# EAGLE board FTIR_v0.1_noCC2 (EAGLE 7.1.0)
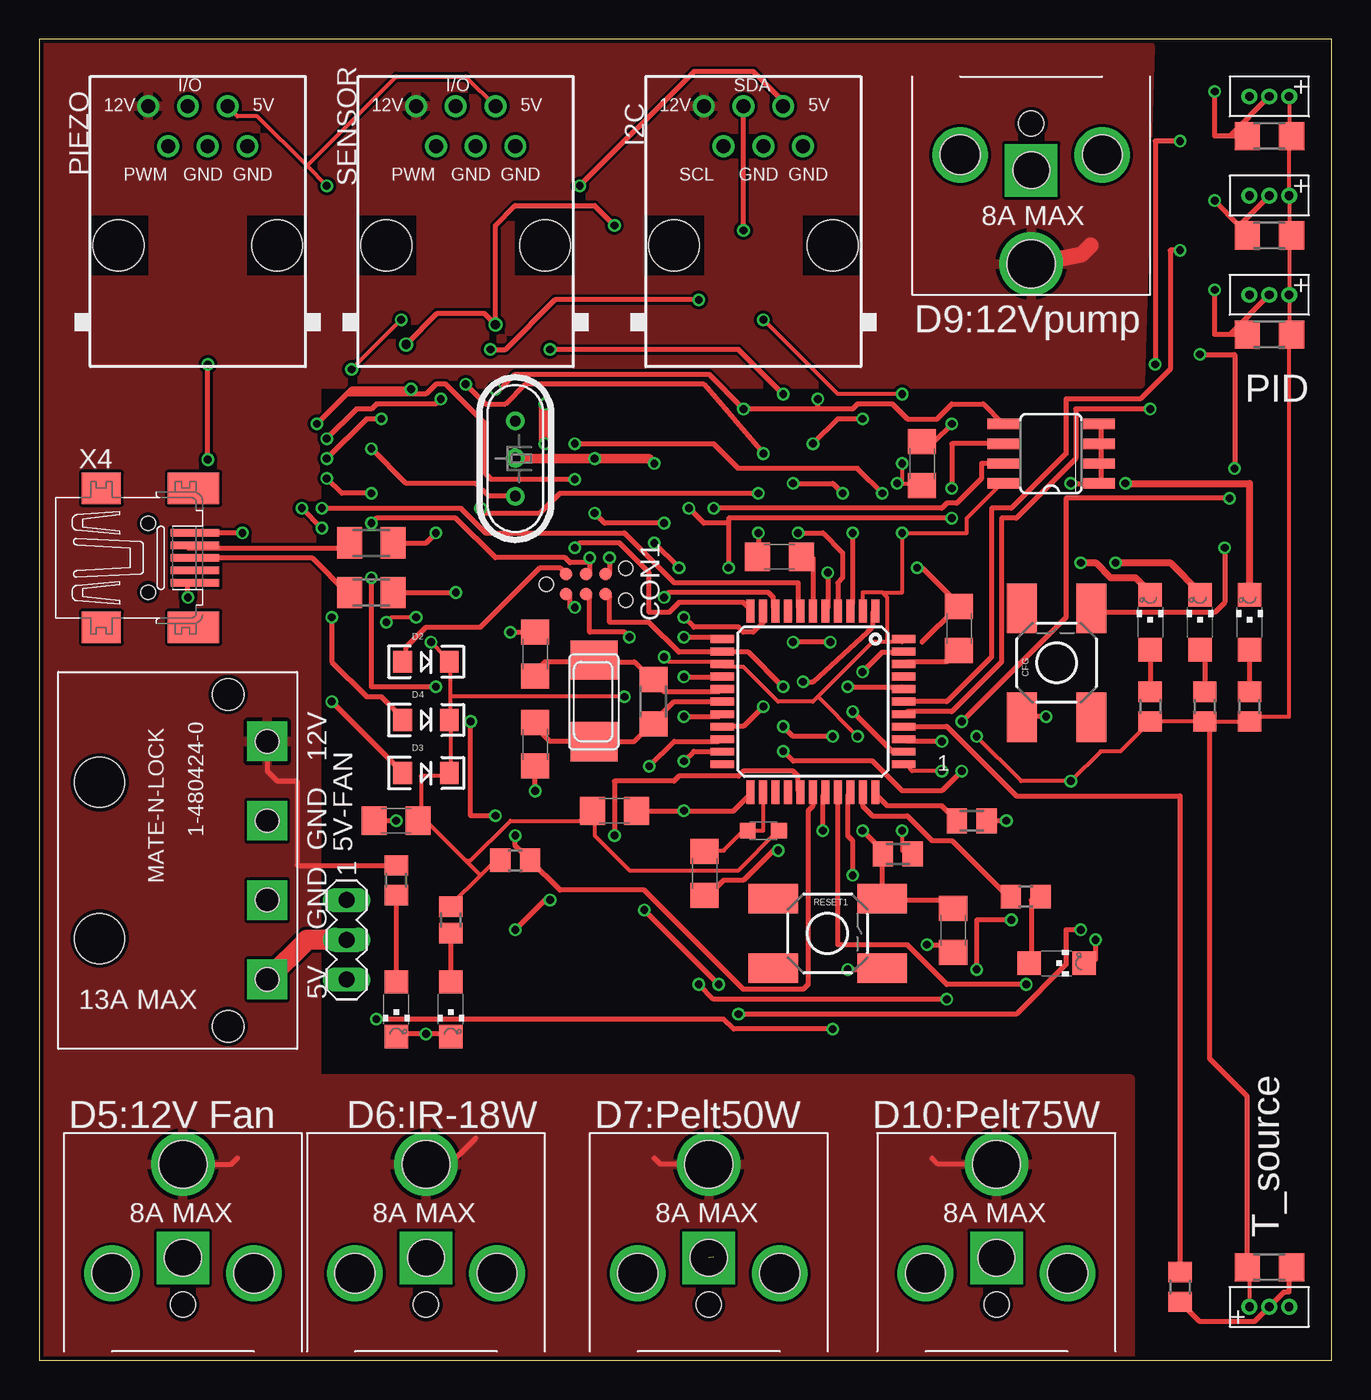
[diagram p0: board, top side]
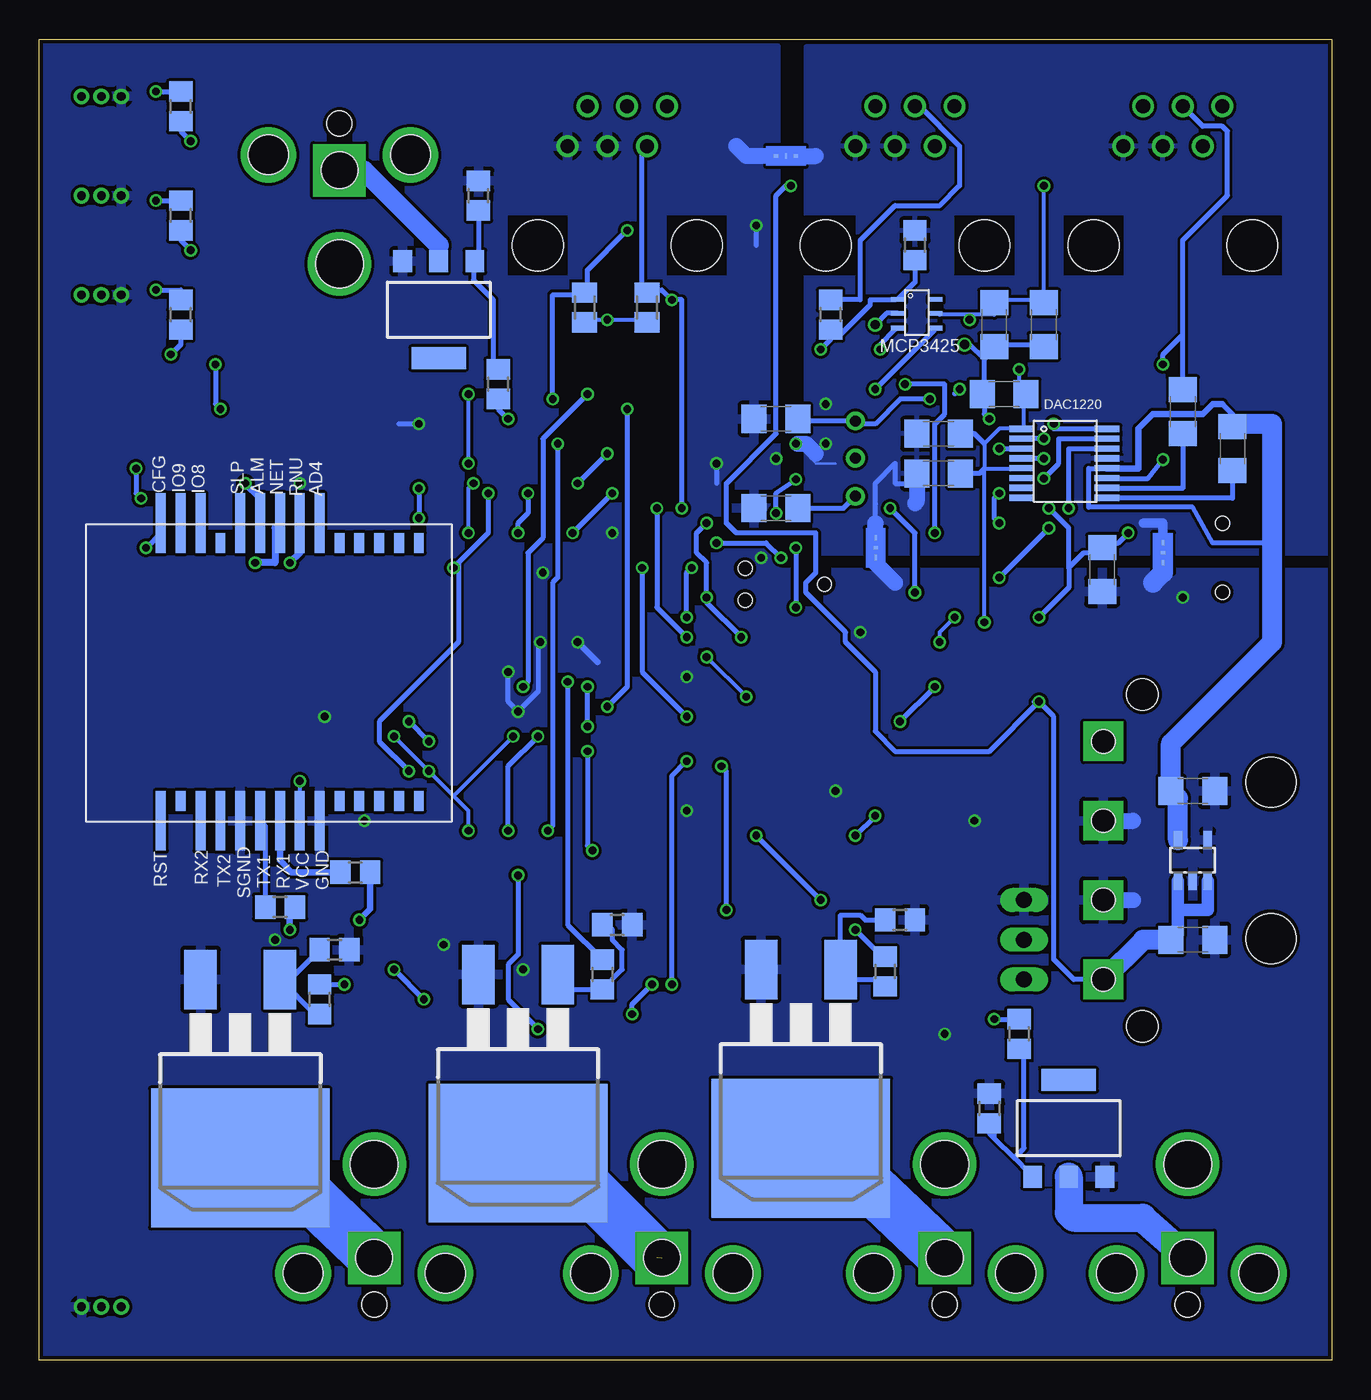
[diagram p1: board, bottom side, seen from below]

Size 82.73 x 84.57 mm. Coordinates in mm from the lower left corner, seen from the top.
Outline: 0,0 82.73,0 82.73,84.57 0,84.57 0,0
Copper layers (1*2*15*16): Top 0.035mm / dielectric 0.2mm / layer 2 0.0175mm / dielectric 1.1mm / layer 15 0.0175mm / dielectric 0.2mm / Bottom 0.035mm
Design rules "SeeedStudio_DRU_no_angle_20130527 *": minimum track width 6mil, minimum drill 0.5mm, track to track 7.5mil, track to pad 7.5mil, pad to pad 7.5mil, via to via 7.5mil, smd to smd 0mil, copper to edge 10mil, drill to drill 10mil, minimum pad ring 6mil, minimum via ring 6mil, stop-mask expansion 2mil, vias tented up to drill 25mil, thermal gap 10mil
Net classes: 0 default: width 0.305 mm, drill 0.254 mm; 1 power: width 0.305 mm, drill 0.254 mm; 2 VIN: width 0.457 mm; 3 fine: width 0.254 mm; 4 aref: width 0.305 mm
vRestrict: area 41.9,34.5 to 57.2,38.4; area 41.9,35.8 to 45.7,49.8; area 53.3,37.1 to 57.2,49.8; area 41.9,46 to 57.2,49.8

## Footprints (pad centres in the part's own frame; a part is rotated, then mirrored left to right if it is on the bottom)
MA03-1 = drill 1.016 long: 1 -2.54,0; 2 0,0; 3 2.54,0
CHIPLED_1206 = smd 1.5 x 1.5: A 0,-1.75; C 0,1.75
C1206 = smd 1.6 x 1.8: 1 -1.4,0; 2 1.4,0
TACTILE_SWITCH_SMD = smd 3.175 x 1.905: 1 -3.493,2.223; 2 3.493,2.223; 3 -3.493,-2.223; 4 3.493,-2.223
TC2030-MCP-NL = smd 0.787 x 0.787: 5V 1.27,0.635; GND 3.81,0.635; MISO 1.27,-0.635; MOSI 2.54,0.635; RESET 3.81,-0.635; SCK 2.54,-0.635 | hole 0.889: 0,0; 5.08,-1.016; 5.08,1.016
LED-1206 = smd 1.2 x 1.4: A -1.5,0; C 1.5,0
RJ12-STRAIGHT-I2C = drill 0.9 pad 1.4: +5V 1.905,8.89; +12V -3.175,8.89; GND1 3.175,6.35; GND2 0.635,6.35; SCL -1.905,6.35; SDA -0.635,8.89 | hole 3.251: -5.08,0; 5.08,0
SOT25 = smd 0.55 x 1.2: 1 -0.95,-1.3; 2 0,-1.3; 3 0.95,-1.3; 4 0.95,1.3; 5 -0.95,1.3
L2012C = smd 1 x 1: 1 -1,0; 2 1,0
RJ12-STRAIGHT = drill 0.9 pad 1.4: +5V 1.905,8.89; +12V -3.175,8.89; GND1 3.175,6.35; GND2 0.635,6.35; I/O -0.635,8.89; PWM -1.905,6.35 | hole 3.251: -5.08,0; 5.08,0
D2PACK = smd 2.083 x 3.81: 1 -2.54,-8.89; 3 2.54,-8.89 | smd 11.43 x 8.89: 2 0,2.54
PG-SOT-223 = smd 1.2 x 1.4: 1 -2.311,-3.099; 2 0,-3.099; 3 2.311,-3.099 | smd 3.5 x 1.4: 4 0,3.099
HC49U = drill 0.7 pad 1.2: 1 -2.413,0; 2 -0.027,0; 3 2.413,0
R0805 = smd 1.3 x 1.5: 1 -0.95,0; 2 0.95,0
R1206 = smd 1.6 x 1.803: 1 -1.422,0; 2 1.422,0
M0805 = smd 1.3 x 1.6: 1 -0.95,0; 2 0.95,0
M1206 = smd 1.6 x 2: 1 -1.4,0; 2 1.4,0
R0805' = smd 1.3 x 1.5: 1 -0.85,0; 2 0.85,0
SO8 = smd 0.66 x 2.032: 1 -3.81,-3.073; 2 -2.54,-3.073; 3 -1.27,-3.073; 4 0,-3.073; 5 0,3.073; 6 -1.27,3.073; 7 -2.54,3.073; 8 -3.81,3.073
STAR = smd 0.152 x 0.305: AGND 0.635,-0.635; DGND 0.635,0.635 | smd 0.305 x 0.152: GND 0.635,0
AMP_MATE_N_LOCK = drill 1.499 pad 2.54 square: 5V 1.905,-7.62; 12V 1.905,7.62; GND1 1.905,2.54; GND2 1.905,-2.54 | hole 1.499: 1.905,-7.62; 1.905,-2.54; 1.905,2.54; 1.905,7.62 | hole 1.999: -0.594,10.617; -0.594,-10.617 | hole 3.2: -8.824,-5; -8.824,5
TQFP44 = smd 1.5 x 0.5: 1 -5.8,4; 2 -5.8,3.2; 3 -5.8,2.4; 4 -5.8,1.6; 5 -5.8,0.8; 6 -5.8,0; 7 -5.8,-0.8; 8 -5.8,-1.6; 9 -5.8,-2.4; 10 -5.8,-3.2; 11 -5.8,-4; 23 5.8,-4; 24 5.8,-3.2; 25 5.8,-2.4; 26 5.8,-1.6; 27 5.8,-0.8; 28 5.8,0; 29 5.8,0.8; 30 5.8,1.6; 31 5.8,2.4; 32 5.8,3.2; 33 5.8,4 | smd 0.5 x 1.5: 12 -4,-5.8; 13 -3.2,-5.8; 14 -2.4,-5.8; 15 -1.6,-5.8; 16 -0.8,-5.8; 17 0,-5.8; 18 0.8,-5.8; 19 1.6,-5.8; 20 2.4,-5.8; 21 3.2,-5.8; 22 4,-5.8; 34 4,5.8; 35 3.2,5.8; 36 2.4,5.8; 37 1.6,5.8; 38 0.8,5.8; 39 0,5.8; 40 -0.8,5.8; 41 -1.6,5.8; 42 -2.4,5.8; 43 -3.2,5.8; 44 -4,5.8
PJ-063BH = drill 2.337 square: GND 0,-5.994 | drill 2.54: SHD1 -4.547,-5.004; SHD2 4.547,-5.004 | drill 3.048: V+ 0,-11.989 | hole 1.6: 0,-2.997 | hole 2.54: -4.547,-5.004; 4.547,-5.004 | hole 3.048: 0,-11.989 | hole 2.337: 0,-5.994
3PINS_SMALL = drill 0.559 pad 1.016: 1 -1.27,0; 2 0,0; 3 1.27,0
SZ05-ZIGBEE3 = smd 1.27 x 0.635: AD1 -7.62,6.35; AD2 -7.62,5.08; AD3 -7.62,3.81; C485 -7.62,-3.81; IO1 -7.62,8.89; IO2 -7.62,7.62; IO3 8.89,8.89; IO4 8.89,7.62; IO5 8.89,6.35; IO6 8.89,5.08; IO7 8.89,3.81; MS 8.89,-6.35 | smd 3.81 x 0.635: AD4 -8.89,2.54; ALM -8.89,-1.27; CFG -8.89,-7.62; GND 10.16,2.54; IO8 -8.89,-5.08; IO9 -8.89,-6.35; NET -8.89,0; RST 10.16,-7.62; RUN -8.89,1.27; RX1 10.16,0; RX2 10.16,-5.08; SLD -8.89,-2.54; SND 10.16,-2.54; TX1 10.16,-1.27; TX2 10.16,-3.81; VCC 10.16,1.27
SSOP-16 = smd 0.4 x 1.6: AGND 1.89,2.134; AVDD 2.52,-3.3; C1 4.409,2.134; C2 3.78,2.134; CS 1.26,2.134; DGND 1.89,-3.3; DNC 3.15,-3.3; DNC1 3.78,-3.3; DNC2 4.409,-3.3; DVDD 0,-3.3; SCLK 0,2.134; SDIO 0.63,2.134; VOUT 3.15,2.134; VREF 2.52,2.134; XIN 1.26,-3.3; XOUT 0.63,-3.3
SOT-23-6 = smd 0.305 x 0.9: SCL 2.45,-0.45; SDA 2.45,1.95; VDD 1.5,1.95; VIN+ 0.6,-0.45; VIN- 0.6,1.95; VSS 1.5,-0.45
NX6035 = smd 2.5 x 3: P$1 2.665,0; P$2 -2.565,0
32005-201 = smd 3.1 x 0.5: 1 3,1.6; 2 3,0.8; 3 3,0; 4 3,-0.8; 5 3,-1.6 | smd 2.5 x 2: M1 -3,-4.45; M2 -3,4.45 | smd 3.3 x 2: M3 2.9,4.45; M4 2.9,-4.45 | hole 0.9: 0,2.2; 0,-2.2

## Placement (x,y rotation side)
5V-FAN  [MA03-1]  19.68,26.92 270 top
5V-OK  RED  [CHIPLED_1206]  26.35,22.48 180 top
12V-OK  RED  [CHIPLED_1206]  22.86,22.48 180 top
BLINK  GREEN  [CHIPLED_1206]  65.13,25.43 270 top
C1  100nF  [C1206]  56.52,57.4 90 top
C2  22pF  [C1206]  31.75,45.21 270 top
C3  100nF  [C1206]  47.38,51.43 0 top
C4  1uF  [C1206]  8.89,26.92 180 bottom
C5  1uF  [C1206]  8.89,36.45 0 bottom
C6  10uF  [C1206]  25.15,59.31 0 bottom
C7  10uF  [C1206]  14.68,50.62 90 bottom
C8  22pF  [C1206]  31.75,39.43 90 top
C9  100nF  [C1206]  58.51,27.52 270 top
C10  10uF  [C1206]  22.86,34.54 180 top
C11  100nF  [C1206]  58.88,46.84 90 top
C12  100nF  [C1206]  36.83,35.18 180 top
C13  100nF  [C1206]  18.41,66.29 90 bottom
C14  10uF  [C1206]  21.59,66.29 90 bottom
C15  2.2nF  [C1206]  9.53,60.73 90 bottom
C16  100nF  [C1206]  42.6,31.17 90 top
C17  0.22nF  [C1206]  6.35,58.36 90 bottom
C18  4.7uF  [C1206]  20.95,61.85 0 bottom
C19  100nF  [C1206]  25.15,56.77 0 bottom
C20  18pF  [C1206]  35.56,60.26 180 bottom
C21  18pF  [C1206]  35.56,54.55 180 bottom
CFG  Configure  [TACTILE_SWITCH_SMD]  65.13,44.65 90 top
CON1  SPI  [TC2030-MCP-NL]  32.46,49.68 0 top
D2  1N581D1206  [LED-1206]  24.77,44.72 0 top
D3  1N581D1206  [LED-1206]  24.77,37.59 0 top
D4  1N581D1206  [LED-1206]  24.77,41 0 top
I2C  RJ12STRAIGHT-I2C  [RJ12-STRAIGHT-I2C]  45.72,71.37 0 top
IC1  LP5907  [SOT25]  8.89,32 0 bottom
L1  10uH  [L2012C]  46.36,33.91 0 top
LED9  RED  [CHIPLED_1206]  71.12,47.24 0 top
LED11  RED  [CHIPLED_1206]  74.3,47.24 0 top
LED12  RED  [CHIPLED_1206]  77.47,47.24 0 top
PIEZO  RJ12  [RJ12-STRAIGHT]  10.16,71.37 0 top
Q1  IRF3704S  [D2PACK]  33.97,16.13 180 bottom
Q3  IRF3704S  [D2PACK]  69.85,15.49 180 bottom
Q4  BSP75  [PG-SOT-223]  57.15,67.25 180 bottom
Q7  IRF3704S  [D2PACK]  52.07,15.81 180 bottom
Q8  BSP75  [PG-SOT-223]  16.83,14.86 0 bottom
QF1  ECS-10.7-7.5A  [HC49U]  30.48,57.72 270 top
R1  10k  [R0805]  26.67,71.37 270 bottom
R2  4.7k  [R1206]  78.74,78.36 180 top
R3  10k  [M0805]  59.69,34.54 180 top
R4  10k  [R0805]  30.48,32 180 top
R8  1K  [R0805]  67.3,29.02 180 bottom
R9  4.7k  [R1206]  78.74,72.01 180 top
R10  4.7k  [R1206]  78.74,65.66 180 top
R11  1K  [R0805]  62.48,31.24 180 bottom
R12  1K  [R0805]  71.12,41.85 270 top
R13  1M  [R1206]  39.32,42.16 270 top
R14  1K  [R0805]  74.61,41.85 270 top
R15  10k  [M0805]  54.97,32.41 0 top
R21  4.7k  [R1206]  78.74,5.97 0 top
R24  22  [M1206]  21.27,49.15 180 top
R28  10K  [M0805]  43.82,67.39 90 bottom
R29  10K  [M0805]  47.8,67.39 90 bottom
R31  22  [M1206]  21.27,52.32 180 top
R32  14.3k  [R0805]  32.07,66.93 90 bottom
R39  1K  [R0805]  77.47,41.85 270 top
RESET1  Reset uC  [TACTILE_SWITCH_SMD]  50.47,27.33 0 top
RL1  1K  [R0805]  64.77,23.11 270 bottom
RL2  1K  [R0805]  46.67,24.7 270 bottom
RL3  1K  [R0805]  22.86,30.73 90 top
RL4  1K  [R0805']  26.35,28.19 270 top
RL5  1K  [R0805]  63.14,29.69 0 top
RL6  1K  [R0805]  73.66,66.93 90 bottom
RL7  1K  [R0805]  73.66,80.26 90 bottom
RL8  1K  [R0805]  73.02,4.7 270 top
RL9  1K  [R0805]  73.66,73.28 90 bottom
RL10  1K  [R0805]  28.57,24.89 270 bottom
RL11  1K  [R0805]  20,20.89 270 bottom
RL12  1K  [R0805]  53.34,62.48 90 bottom
RL13  10K  [R0805]  27.62,28.19 180 bottom
RL14  10K  [R0805]  21.91,16.13 270 bottom
RL15  10K  [R0805]  63.82,26.29 180 bottom
RL16  10K  [R0805]  45.72,27.88 180 bottom
RL17  10K  [R0805]  54.61,74.55 270 bottom
SENSOR  RJ12  [RJ12-STRAIGHT]  27.3,71.37 0 top
U$1  M24512  [SO8]  64.77,59.94 90 top
U$2  STARGND  [STAR]  28.55,52.02 180 bottom
U$3  AMP_MATE_N_LOCK  [AMP_MATE_N_LOCK]  12.7,32 0 top
U$4  ATMEGA32U4  [TQFP44]  49.53,42.16 270 top
U$5  STARGND  [STAR]  34.93,76.45 90 bottom
U$6  JACK_PJ-063BH  [PJ-063BH]  42.86,0.57 180 top
U$9  DS18B20_PINS  [3PINS_SMALL]  78.74,68.2 180 top
U$10  DS18B20_PINS  [3PINS_SMALL]  78.74,3.43 0 top
U$11  DS18B20_PINS  [3PINS_SMALL]  78.74,80.9 180 top
U$12  DS18B20_PINS  [3PINS_SMALL]  78.74,74.55 180 top
U$13  SZ05-ZIGBEESMD  [SZ05-ZIGBEE3]  67.31,44.7 270 bottom
U$14  DAC1220  [SSOP-16]  16.51,59.63 270 bottom
U$15  MCP3425  [SOT-23-6]  27.3,68.52 270 bottom
U$16  JACK_PJ-063BH  [PJ-063BH]  61.28,0.57 180 top
U$17  JACK_PJ-063BH  [PJ-063BH]  24.77,0.57 180 top
U$18  JACK_PJ-063BH  [PJ-063BH]  9.21,0.57 180 top
U$19  JACK_PJ-063BH  [PJ-063BH]  63.5,82.17 0 top
U$20  STARGND  [STAR]  10.16,51.69 180 bottom
X3  16MHz  [NX6035]  35.51,42.16 90 top
X4  MINI-USB  [32005-201]  6.98,51.37 0 top

## Library data of the parts
5V-FAN = con-lstb; OC_FARNELL: unknown; OC_NEWARK: unknown
5V-OK 12V-OK BLINK LED9 LED11 LED12 U$4 = adafruit
C1-C21 L1 R1 R4 R8 R11-R14 R32 R39 RL1-RL3 RL5-RL17 = rcl
CFG CON1 D2-D4 I2C PIEZO RESET1 SENSOR U$1-U$3 U$5 U$6 U$9-U$13 U$16-U$20 X3 = lpatiny
IC1 = v-reg
Q1 Q3 Q7 = transistor-power
Q4 Q8 = infineon; OC_FARNELL: unknown; OC_NEWARK: unknown
QF1 = crystal; OC_FARNELL: unknown; OC_NEWARK: unknown
R2 R3 R9 R10 R15 R21 R24 R28 R29 R31 RL4 = resistor
U$14 = FTIR
U$15 = phMeter
X4 = con-cypressindustries; OC_FARNELL: unknown; OC_NEWARK: unknown

## Nets
2.5V: C5.1 C17.2 IC1.5 U$14.VREF
+5V [power]: 5V-FAN.2 C4.2 D3.A I2C.+5V IC1.1 IC1.3 U$3.5V
+5V/1 [fine]: C1.1 C6.2 C10.1 C12.2 C13.2 C14.2 C18.2 C19.2 D2.C D3.C D4.C L1.2 PIEZO.+5V R2.1 R4.2 R9.1 R10.1 R12.2 R14.2 R15.2 R21.1 R28.1 R29.1 R39.2 RL4.1 SENSOR.+5V U$1.8 U$4.2 U$4.14 U$4.34 U$4.44 U$9.1 U$10.1 U$11.1 U$12.1 U$13.VCC U$14.AVDD U$14.DVDD U$15.VDD
+12V [power]: I2C.+12V PIEZO.+12V RL3.2 SENSOR.+12V U$3.12V U$6.V+ U$16.V+ U$17.V+ U$18.V+ U$19.V+
A0: RL6.1 U$4.36
A1: RL8.1 U$4.37
A2: RL7.1 U$4.38
A3: RL9.1 U$4.39
A4: R1.2 R32.1 U$4.40 U$15.VIN+
A5: U$4.41
AGND: C6.1 C11.2 C16.1 C19.1 PIEZO.GND1 PIEZO.GND2 R1.1 SENSOR.GND1 SENSOR.GND2 U$2.AGND U$5.AGND U$14.AGND U$20.AGND
AREF: C11.1 U$4.42
CS: U$4.25
D5*: RL11.1 U$4.31
D6*: RL10.1 U$4.27
D7*: RL2.1 U$4.1
D8*: R4.1 U$4.28 U$14.CS
D9*: RL12.1 U$4.29
D10*: RL1.1 U$4.30
D11*: U$1.7 U$4.12
D12*: U$4.26
D13*: RL5.1 U$4.32
GND [power]: 5V-FAN.1 5V-OK.C 12V-OK.C BLINK.C C1.2 C2.1 C3.1 C4.1 C5.2 C7.1 C8.1 C9.2 C10.2 C12.1 C13.1 C14.1 C18.1 C20.2 C21.2 CFG.1 CON1.GND I2C.GND1 I2C.GND2 IC1.2 IC1.4 Q1.3 Q3.3 Q4.3 Q7.3 Q8.3 QF1.2 R3.1 RESET1.4 RL13.1 RL14.1 RL15.1 RL16.1 RL17.1 U$1.1 U$1.2 U$1.3 U$1.4 U$2.DGND U$2.GND U$3.GND1 U$3.GND2 U$4.5 U$4.15 U$4.23 U$4.35 U$4.43 U$5.DGND U$5.GND U$9.3 U$10.3 U$11.3 U$12.3 U$13.GND U$13.SND U$14.DGND U$15.VSS U$20.DGND U$20.GND X4.5
GND1 [VIN]: LED9.C U$13.RUN
GND2 [VIN]: LED11.C U$13.NET
GND3 [VIN]: LED12.C U$13.ALM
HWB: R3.2 U$4.33
ISP+5V: CON1.5V D2.A
MISO: CON1.MISO U$4.11
MOSI: CON1.MOSI U$4.10 U$14.SDIO
N$1: Q4.1 RL12.2 RL17.2
N$2: R32.2 SENSOR.I/O
N$3: BLINK.A RL5.2
N$4: Q4.2 U$19.GND
N$6: Q7.1 RL2.2 RL16.2
N$7: Q1.2 U$17.GND
N$9 [power]: R21.2 RL8.2 U$10.2
N$11: R11.2 U$13.RX1
N$12: 5V-OK.A RL4.2
N$13: Q3.1 RL1.2 RL15.2
N$14 [fine]: C16.2 L1.1 U$4.24
N$15: C15.1 U$14.C2
N$16: C3.2 U$4.6
N$17 [power]: R2.2 RL7.2 U$11.2
N$18 [power]: R9.2 RL9.2 U$12.2
N$19: C21.1 QF1.3 U$14.XIN
N$21 [power]: R10.2 RL6.2 U$9.2
N$22: Q8.2 U$18.GND
N$24: R8.2 U$13.TX1
N$25: LED9.A R12.1
N$26: LED11.A R14.1
N$27: LED12.A R39.1
N$28: Q1.1 RL10.2 RL13.2
N$29: C17.1 U$14.C1
N$30: Q7.2 U$6.GND
N$31: C20.1 QF1.1 U$14.XOUT
N$34: Q3.2 U$16.GND
N$35: CFG.4 U$13.CFG
N$37: Q8.1 RL11.2 RL14.2
N$42: C8.2 R13.2 U$4.17 X3.P$2
N$75: 12V-OK.A RL3.1
PIEZO: C15.2 PIEZO.I/O U$14.VOUT
RESET: C9.1 CON1.RESET R15.1 RESET1.2 U$4.13
RX: R8.1 U$4.20
RXLED: U$4.8
SCK: CON1.SCK U$4.9 U$14.SCLK
SCL: I2C.SCL R28.2 U$1.6 U$4.18 U$15.SCL
SDA: I2C.SDA R29.2 U$1.5 U$4.19 U$15.SDA
TX: R11.1 U$4.21
TXLED: U$4.22
USB_N: R31.1 U$4.3
USB_P: R24.1 U$4.4
USBC_N: R31.2 X4.2
USBC_P: R24.2 X4.3
VUSB: C7.2 D4.A U$4.7 X4.1
XTAL1: C2.2 R13.1 U$4.16 X3.P$1

## Tracks (layer width: path | path; a pad name or v marks a point on that pad's centre or on a via)
2.5V
  Bottom 0.305: 6.98,61.21 6.35,60.58 C17.2 | 3.81,52.32 7.62,52.32 8.89,54.61 15.56,54.61 15.56,57.09 14.4,57.09
  Bottom 0.406: 6.98,61.21 7.62,61.21 8.26,60.58 11.43,60.58 12.38,59.63 12.38,57.09 14.4,57.09 U$14.VREF
  Bottom 1.27: IC1.5 9.84,36 C5.1 10.29,39.49 3.81,45.97 3.81,52.32 3.81,59.94 6.16,59.94 C17.2
+5V  (via drill 0.5)
  Top 0.305: v18.73,42.16 23.18,37.72 D3.A | v34.61,75.18 41.91,82.49 45.72,82.49 47.62,80.58 I2C.+5V
  Top 1.27: U$3.5V 17.14,26.92 5V-FAN.2
  Bottom 0.305: 19.05,41.85 v18.73,42.16 | U$3.5V 16.51,24.38 17.78,25.65 17.78,41.21 v18.73,42.16 | v34.61,75.18 34.93,75.18 35.56,74.55 35.56,59.31 38.74,56.13 38.74,53.59 38.1,52.96 33.02,52.96 33.02,50.42 33.66,49.78 33.66,49.15 31.11,46.61 31.11,45.97 29.21,44.07 29.21,40.26 27.94,38.99 21.91,38.99 v18.73,42.16 | 19.05,42.16 v18.73,42.16
  Bottom 0.813: C4.2 arc-90 9.84,27.37 9.84,28.83 | 9.84,28.83 IC1.1 | IC1.3 7.94,28.83 9.84,28.83
  Bottom 1.27: C4.2 12.06,26.92 U$3.5V
+5V/1  (via drill 0.5)
  Top 0.254: U$11.1 80.01,78.36 | 80.01,65.66 U$9.1 80.01,72.01 | 80.01,72.01 U$12.1 80.01,78.36 | 80.01,72.01 R9.1 | 80.01,78.36 R2.1 | v57.79,37.72 55.88,37.72 55.56,38.04 U$4.34 | v55.25,33.91 55.25,32.64 55.88,32.64 R15.2 | R14.2 R12.2 | R14.2 R39.2 77.47,41.21 80.01,41.21 80.01,65.66 | R14.2 | R12.2 69.21,38.99 67.94,38.99 v66.04,37.08 62.87,37.08 v60.01,39.94 | R12.2 | 80.01,65.66 R10.1 | PIEZO.+5V 12.7,79.63 13.97,79.63 17.14,76.45 | v18.41,75.18 17.14,76.45 | SENSOR.+5V 27.3,82.17 22.86,82.17 17.14,76.45 | v23.18,66.61 v20,63.44 | L1.2 47.31,33.91 44.77,31.37 37.78,31.37 35.56,33.59 35.56,35.18 C12.2 35.24,35.18 34.61,34.54 30.16,34.54 27.62,32 27.3,32 | 28.26,31.05 29.21,32 R4.2 | 28.26,31.05 26.35,29.15 RL4.1 | 26.35,42.48 26.35,41.21 D4.C 26.35,40.89 26.35,37.72 D3.C 26.04,37.4 24.45,37.4 24.45,34.54 | 26.35,42.48 26.35,44.7 D2.C 26.04,45.02 v25.08,45.97 | 27.3,32 24.77,34.54 24.45,34.54 | 27.3,32 28.26,31.05 | 24.45,34.54 C10.1 | 49.85,42.48 53.34,45.97 54.29,45.97 | 49.85,42.48 49.53,42.16 47.31,42.16 45.09,44.39 43.82,44.39 U$4.14 43.5,44.7 40.32,44.7 v40.01,45.02 | 54.29,45.97 55.25,45.97 U$4.44 | 53.98,49.15 52.71,49.15 52.71,48.2 U$4.2 | 53.98,49.15 54.29,48.83 54.29,45.97 | 55.25,56.13 56.52,56.13 C1.1 | 53.98,49.15 55.25,49.15 v55.25,52.96 59.37,52.96 59.37,53.91 61.6,56.13 U$1.8 | v46.36,66.61 51.12,61.85 v55.25,61.85 | 55.25,56.13 v55.25,57.4 | 55.25,56.13 v54.93,56.13 | v37.47,42.48 26.35,42.48 | v22.22,47.24 22.54,47.56 v24.13,47.56 | 49.85,42.48 v52.39,39.94 | U$10.1 77.47,5.97 R21.1
  Top 0.305: R21.1 77.32,16.92 74.93,19.3 74.93,40.58 R14.2
  Bottom 0.254: 56.2,36.13 55.25,35.18 v55.25,33.91 | 56.2,36.13 v57.79,37.72 v60.01,39.94 | v66.04,37.08 U$13.VCC | 22.22,57.09 20,57.09 U$14.AVDD | 22.22,57.09 22.22,58.67 21.27,59.63 U$14.DVDD 19.68,59.63 19.68,61.85 | 23.18,66.93 21.59,66.93 C14.2 21.59,67.88 18.41,67.88 | 23.18,66.93 25.08,66.93 U$15.VDD | 18.41,67.88 v18.41,75.18 | 18.41,67.88 C13.2 | 19.68,61.85 20,62.17 v20,63.44 | 23.18,66.93 v23.18,66.61 | 19.68,61.85 C18.2 | R28.1 43.82,66.61 v46.36,66.61 47.62,66.61 R29.1 | v54.93,56.13 55.25,55.82 v55.25,52.96 | v55.25,57.4 v55.25,61.85 | v40.01,45.02 v37.47,42.48 | v22.22,47.24 22.22,57.09 | v24.13,47.56 25.08,46.61 v25.08,45.97 | v52.39,39.94 56.2,36.13
  Bottom 0.305: 22.22,58.67 22.86,59.31 C6.2 | 22.22,57.09 22.54,56.77 C19.2
+12V
  Top 0.305: U$17.V+ 26.28,12.56 27.94,14.22 | U$6.V+ 39.76,12.56 39.37,12.95 | U$16.V+ 57.54,12.56 57.15,12.95 | U$18.V+ 12.31,12.56 12.7,12.95 | RL3.2 16.51,31.69 16.51,37.08 15.24,37.08 14.61,37.72 U$3.12V
  Top 1.016: U$19.V+ 66.75,70.81 67.31,71.37
  pour Top: 0,0.25 69.85,0.25 69.85,18.03 17.78,18.03 17.78,62.48 70.48,62.48 71.12,84.07 0,84.07
A0  (via drill 0.5)
  Top 0.305: v57.79,39.62 55.56,39.62 U$4.36 | v59.05,40.89 65.72,47.56 65.72,55.18 v76.2,55.18 | v76.52,57.09 76.52,64.39 v74.3,64.39
  Bottom 0.305: v59.05,40.89 v57.79,39.62 | v76.2,55.18 76.52,55.5 v76.52,57.09 | v74.3,64.39 73.66,65.02 RL6.1
A1
  Top 0.305: RL8.1 73.02,36.13 62.55,36.13 58.1,40.58 55.56,40.58 U$4.37
A2  (via drill 0.5)
  Top 0.305: v71.12,60.9 66.36,60.9 66.36,57.72 62.55,53.91 61.6,53.91 61.6,44.7 58.42,41.53 55.56,41.53 U$4.38 | v71.44,63.75 71.44,78.04 v73.02,78.04
  Bottom 0.305: v71.12,60.9 71.44,61.21 v71.44,63.75 | v73.02,78.04 73.66,78.68 RL7.1
A3  (via drill 0.5)
  Top 0.305: U$4.39 58.1,42.16 60.96,45.02 60.96,54.55 62.23,54.55 65.72,58.04 65.72,61.53 70.48,61.53 72.39,63.44 72.39,71.06 v73.02,71.06
  Bottom 0.305: v73.02,71.06 73.66,71.69 RL9.1
A4  (via drill 0.5)
  Top 0.305: v51.75,43.12 55.25,43.12 U$4.40 | 33.02,64.71 v32.7,64.71 44.77,64.71 v47.62,61.85
  Bottom 0.305: 32.07,65.66 31.43,65.66 29.53,67.56 29.53,67.88 27.94,67.88 U$15.VIN+ 26.67,69 R1.2 | 32.07,65.66 R32.1 | v51.75,43.12 51.44,43.43 51.44,51.69 50.48,52.64 50.48,58.99 v47.62,61.85 | v32.7,64.71 32.07,65.34 32.07,65.66
AGND  (via drill 0.5)
  Top 0.305: v47.31,32.64 46.99,32.64 45.09,30.73 43.82,30.73 42.86,29.78 C16.1 | 56.52,45.97 58.74,48.2 C11.2 58.74,48.51 56.52,50.74 v56.2,50.74 | v53.98,55.5 52.39,57.09 44.77,57.09 43.18,58.67 v34.29,58.67 | v47.62,38.99 48.26,38.35 53.34,38.35 55.25,36.45 57.79,36.45 v59.05,37.72
  Top 0.813: v32.38,58.67 v32.38,61.21
  Bottom 0.152: 31.75,57.4 33.02,57.4 v34.29,58.67
  Bottom 0.305: v47.31,32.64 47.62,32.96 v47.62,38.99 | 55.88,51.05 53.98,52.96 v53.98,55.5 | 55.88,51.05 v56.2,50.74 | v34.29,58.67 34.16,58.67 | 29.18,53.57 29.18,54.84 29.21,54.86 29.21,56.13 27.94,57.4 27.94,56.13 26.55,56.13 | 55.88,51.05 55.88,45.97 60.96,40.89 60.96,39.62 v59.05,37.72
  Bottom 0.61: U$20.AGND 10.79,53.59 12.06,53.59
  Bottom 1.016: 34.16,58.67 33.65,58.67 33.02,58.04 | U$5.AGND 33.02,77.09 | U$2.AGND 29.18,53.57 29.21,53.59 | C19.1 26.55,56.13 26.55,54.99 26.67,54.86
  pour Bottom: 0,84.07 33.66,84.07 33.66,51.69 0,51.69
AREF
  Top 0.305: U$4.42 55.56,44.7 58.1,44.7 58.74,45.34 C11.1
D5*  (via drill 0.5)
  Top 0.305: v21.59,21.84 43.82,21.84 44.45,21.21 v50.8,21.21 | v52.07,31.05 52.07,33.27 51.75,33.59 51.75,36.13 U$4.31
  Bottom 0.305: v21.59,21.84 RL11.1 | v50.8,21.21 52.71,23.11 52.71,25.34 52.07,25.97 v52.07,31.05
D6*  (via drill 0.5)
  Top 0.305: v30.48,27.56 32.38,29.46 v32.7,29.46 | v36.83,33.59 36.83,37.08 40.64,37.08 40.96,37.4 44.77,37.4 45.09,37.72 48.26,37.72 48.58,37.4 48.58,36.45 U$4.27
  Bottom 0.305: 30.16,27.24 v30.48,27.56 29.21,26.29 28.57,26.29 RL10.1 | v36.83,33.59 v32.7,29.46
D7*  (via drill 0.5)
  Top 0.305: U$4.1 53.34,47.88 53.34,46.93 53.02,46.61 49.53,43.43 v48.9,43.43
  Bottom 0.305: v48.9,43.43 48.9,27.88 RL2.1
D8*  (via drill 0.5)
  Top 0.305: R4.1 33.34,30.1 38.74,30.1 45.09,23.75 48.9,23.75 49.21,24.07 49.21,35.18 49.53,35.5 U$4.28 | v18.1,53.28 v16.83,54.55 | v21.27,50.1 21.27,43.12 v25.4,43.12 | v27.62,40.89 27.62,34.86 v29.21,34.86 | v30.48,33.59 30.48,32.96 R4.1 | R4.1
  Bottom 0.305: v16.83,54.55 16.83,58.36 14.61,58.36 U$14.CS | v21.27,50.1 v18.1,53.28 | v27.62,40.89 v25.4,43.12 | v30.48,33.59 v29.21,34.86
D9*  (via drill 0.5)
  Top 0.305: v50.17,33.91 50.17,36.13 U$4.29 | v49.53,58.67 51.12,60.26 v52.71,60.26
  Bottom 0.305: v50.17,33.91 49.85,34.23 49.85,49.78 49.53,50.1 v49.53,58.67 | v52.71,60.26 53.34,60.9 RL12.1
D10*  (via drill 0.5)
  Top 0.305: v63.18,24.07 58.1,24.07 55.56,26.61 51.12,26.61 51.12,36.13 U$4.30
  Bottom 0.305: v63.18,24.07 RL1.1
D11*  (via drill 0.5)
  Top 0.305: v41.28,46.29 43.5,46.29 U$4.12 | v43.18,54.55 57.79,54.55 58.1,54.86 58.74,54.86 60.33,56.45 60.33,57.4 U$1.7
  Bottom 0.305: v41.28,46.29 43.18,48.2 v43.18,54.55
D13*
  Top 0.305: RL5.1 61.91,29.78 58.42,33.27 57.15,33.27 55.56,34.86 53.34,34.86 52.71,35.5 52.71,36.13 U$4.32
GND  (via drill 0.5, 0.6)
  Top 0.305: v18.41,57.72 20.95,60.26 v21.91,60.26 | C12.1 v41.28,35.18 44.45,35.18 45.4,36.13 U$4.23 | 67.94,57.4 67.94,56.13 U$1.1 v66.04,56.13 | 67.94,58.67 67.94,59.94 U$1.4 | 67.94,58.67 67.94,57.4 | 67.94,57.4 U$1.2 | 67.94,58.67 U$1.3 | 12V-OK.C 22.86,20.89 v24.77,20.89 26.35,20.89 5V-OK.C | v36.51,51.37 36.51,50.42 CON1.GND | v67.63,26.92 67.63,25.65 66.99,25.65 BLINK.C | v41.28,43.75 43.5,43.75 U$4.15 | v50.48,50.42 50.48,48.2 U$4.5 | v61.91,34.54 R3.1 | v56.83,26.61 58.1,26.61 58.42,26.29 C9.2 | v22.86,34.54 C10.2 | v31.75,36.45 C8.1 | v30.16,46.61 C2.1 | v46.04,52.96 46.04,51.69 C3.1 | v9.53,48.83 9.53,49.78 X4.5 | v51.75,25.02 53.66,25.02 RESET1.4 | v64.45,41.21 63.18,41.21 CFG.1 | C1.2 57.28,58.8 v58.42,59.94 | v36.83,72.64 35.56,73.91 30.48,73.91 29.21,72.64 v29.21,66.29 28.49,67.02 25.49,67.02 v23.5,65.02 | v50.65,45.97 v48.26,45.97 | v52.07,41.53 54.61,38.99 55.25,38.99 U$4.35 | v52.71,44.07 53.98,45.34 55.25,45.34 U$4.43
  Top 0.61: QF1.2 30.51,57.72 v35.56,57.72 39.05,57.72 v39.37,57.4
  Bottom 0.152: U$5.GND U$5.DGND
  Bottom 0.305: C13.1 18.41,65.02 21.59,65.02 C14.1 21.59,64.71 22.22,64.07 | v18.41,57.72 19.68,57.72 U$14.DGND | v21.91,60.26 22.22,60.58 22.22,61.85 | 22.22,61.85 22.22,64.07 | 22.22,61.85 C18.1 | U$20.DGND U$20.GND | U$2.DGND U$2.GND | v58.42,59.94 59.69,59.94 | U$15.VSS 28.49,67.02 v29.21,66.29 | v36.83,72.64 36.83,71.37 | 22.22,64.07 23.18,65.02 v23.5,65.02 | v39.37,57.4 39.37,56.13 | v50.65,45.97 50.8,45.97 50.8,42.8 v52.07,41.53 52.71,42.16 v52.71,44.07
  Bottom 0.406: v48.26,45.97 46.99,44.7
  Bottom 1.016: U$2.DGND 29.18,51.03 27.94,49.78 | U$5.DGND 37.47,77.09 38.1,77.72 | U$3.GND1 12.7,34.54 | U$3.GND2 12.7,29.46
  Bottom 1.27: U$20.DGND 10.79,50.42 11.43,49.78
  pour Bottom: 35.56,84.07 82.55,84.07 82.55,0.25 0,0.25 0,50.42 35.56,50.42
GND1  (via drill 0.5)
  Top 0.457: v66.67,51.05 67.63,51.05 68.58,50.1 70.17,50.1 71.12,49.15 LED9.C
  Bottom 0.457: v66.67,51.05 66.04,51.69 U$13.RUN
GND2  (via drill 0.5)
  Top 0.457: v68.9,51.05 72.39,51.05 74.3,49.15 LED11.C
  Bottom 0.457: v68.9,51.05 67.63,51.05 67.63,53.28 U$13.NET
GND3  (via drill 0.5)
  Top 0.457: LED12.C 77.47,56.13 v69.53,56.13
  Bottom 0.457: v69.53,56.13 68.58,55.18 U$13.ALM
HWB
  Top 0.305: U$4.33 53.66,36.13 54.29,35.5 57.79,35.5 R3.2
ISP+5V
  Top 0.305: CON1.5V 33.66,50.42 33.34,50.74 32.07,50.74 28.26,46.93 24.77,46.93 23.5,45.66 23.5,45.02 D2.A
MISO  (via drill 0.5)
  Top 0.305: v34.29,48.2 33.97,48.2 33.97,48.83 CON1.MISO | v34.29,52.01 34.61,52.32 37.15,52.32 39.05,50.42 39.05,47.88 40.32,47.88 40.96,48.51 45.09,48.51 45.4,48.2 U$4.11
  Bottom 0.305: v34.29,52.01 v34.29,48.2
MOSI  (via drill 0.5)
  Top 0.305: 35.24,51.05 35.24,50.42 CON1.MOSI | v40.96,50.74 v39.37,52.32 | v41.28,47.56 41.91,46.93 44.77,46.93 45.09,46.61 45.72,46.61 46.36,47.24 46.36,47.88 U$4.10 | v18.41,56.45 19.37,55.5 v21.27,55.5 | v21.27,53.59 21.59,53.91 26.67,53.91 29.21,51.37 33.66,51.37 33.97,51.05 35.24,51.05 | 35.24,51.05 v35.24,51.37
  Bottom 0.305: v35.24,51.37 36.2,52.32 v39.37,52.32 | v40.96,50.74 41.28,50.42 v41.28,47.56 | v18.41,56.45 17.46,57.4 17.46,58.99 14.61,58.99 U$14.SDIO | v21.27,55.5 21.59,55.18 21.59,53.91 v21.27,53.59
N$1
  Bottom 0.305: RL17.2 54.61,70.42 Q4.1 54.93,70.1 54.93,69.15 53.66,67.88 53.66,63.75 RL12.2
N$2
  Bottom 0.305: SENSOR.I/O 26.35,80.26 23.81,77.72 23.81,75.18 25.08,73.91 27.94,73.91 30.16,71.69 30.16,67.88 R32.2
N$3
  Top 0.305: BLINK.A 63.5,25.65 63.5,29.46 63.82,29.46 RL5.2
N$4
  Bottom 1.016: 57.15,71.37 Q4.2
  Bottom 1.27: 57.15,71.37 61.95,76.17 U$19.GND
N$6
  Bottom 0.305: RL2.2 49.53,23.75 Q7.1 | RL2.2 45.4,25.02 45.4,26.29 46.04,26.92 46.04,27.56 46.36,27.88 RL16.2 | RL2.2
N$7
  Bottom 1.676: Q1.2 32.11,13.59
  Bottom 3.302: 32.11,13.59 U$17.GND
N$9
  Top 0.305: RL8.2 74.3,2.48 77.79,2.48 U$10.2 79.69,4.38 80.01,4.38 80.01,5.97 R21.2
N$11
  Bottom 0.406: R11.2 66.55,31.24 67.31,32 U$13.RX1
N$12
  Top 0.305: RL4.2 5V-OK.A
N$13
  Bottom 0.305: 66.99,24.07 65.41,22.48 64.77,22.48 RL1.2 | 66.99,24.07 RL15.2 | 66.99,24.07 Q3.1
N$14
  Top 0.254: C16.2 42.86,32.64 43.82,32.64 45.09,33.91 L1.1 46.36,33.91 46.36,36.13 U$4.24
N$15
  Bottom 0.305: C15.1 9.53,55.82 14.29,55.82 U$14.C2
N$16
  Top 0.305: U$4.6 49.53,51.37 48.9,51.37 C3.2
N$17  (via drill 0.5)
  Top 0.305: v75.25,81.22 75.25,78.36 76.2,78.36 | R2.2 76.2,78.36 | 76.2,78.36 U$11.2
  Bottom 0.305: v75.25,81.22 RL7.2
N$18  (via drill 0.5)
  Top 0.305: 76.83,72.64 77.47,72.01 R9.2 76.83,72.64 | 76.83,72.64 v75.25,74.23 | 76.83,72.64 U$12.2
  Bottom 0.305: v75.25,74.23 RL9.2
N$19  (via drill 0.5)
  Top 0.305: QF1.3 28.77,55.31 27.94,56.13 23.5,56.13 v21.27,58.36
  Bottom 0.305: v21.27,58.36 20,58.36 U$14.XIN | C21.1 31.24,54.55 QF1.3
N$21  (via drill 0.5)
  Top 0.305: v75.25,68.52 75.25,65.66 76.2,65.66 | R10.2 76.2,65.66 | 76.2,65.66 U$9.2
  Bottom 0.305: v75.25,68.52 73.66,68.52 RL6.2
N$22
  Bottom 1.778: Q8.2 16.83,9.46 16.51,9.14 12.1,9.14 U$18.GND
N$24
  Bottom 0.305: U$13.TX1 68.26,34.23 68.26,29.46 68.58,29.15 R8.2
N$25
  Top 0.305: LED9.A R12.1
N$26
  Top 0.305: R14.1 74.61,45.34 74.3,45.34 LED11.A
N$27
  Top 0.305: LED12.A R39.1
N$28
  Bottom 0.305: RL10.2 28.57,24.38 31.43,24.38 Q1.1 31.43,28.51 30.16,28.51 29.84,28.19 RL13.2
N$29
  Bottom 0.305: C17.1 6.35,55.18 14.29,55.18 U$14.C1
N$30  (1 unrouted)
  Bottom 1.676: Q7.2 49.89,13.27
  Bottom 3.048: 49.89,13.27 49.85,13.27
  Bottom 3.302: 49.85,13.27 43.18,6.6
N$31  (via drill 0.5)
  Top 0.305: v18.41,58.99 20.32,60.9 21.27,60.9 21.59,61.21 25.4,61.21 v25.72,61.53
  Bottom 0.305: v18.41,58.99 19.68,58.99 U$14.XOUT | v25.72,61.53 27.62,61.53 29.21,59.94 30.29,59.94 QF1.1 34.03,60.13 C20.1
N$34
  Bottom 3.048: Q3.2 67.98,12.95
  Bottom 3.302: 67.98,12.95 U$16.GND
N$35  (via drill 0.5)
  Top 0.305: v75.88,52.01 75.88,48.51 75.25,47.88 67.63,47.88 CFG.4
  Bottom 0.305: v75.88,52.01 74.93,52.96 U$13.CFG
N$37
  Bottom 0.305: 21.59,14.22 21.91,14.54 RL14.2 | 21.59,14.22 20.32,12.95 | 20.32,12.95 19.37,12 Q8.1 | 21.59,14.22 21.59,14.54 | 20.32,12.95 19.68,13.59 19.68,19.62 RL11.2
N$42
  Top 0.305: U$4.17 40.64,42.16 39.37,40.89 R13.2 39.05,40.58 38.1,39.62 35.56,39.62 X3.P$2 35.24,39.62 32.7,39.62 31.75,40.58 C8.2
N$75
  Top 0.305: RL3.1 12V-OK.A
PIEZO  (via drill 0.5)
  Top 0.305: v10.79,57.66 v10.79,63.75
  Bottom 0.305: U$14.VOUT 14.29,56.45 11.75,56.45 v10.79,57.66 | PIEZO.I/O 8.26,78.99 6.98,78.99 6.67,78.68 6.67,74.55 9.53,71.69 9.53,65.66 | C15.2 9.53,65.66 | v10.79,63.75 10.79,64.39 9.53,65.66
RESET  (via drill 0.5)
  Top 0.305: CON1.RESET 36.51,48.83 36.51,47.24 39.05,47.24 40.96,45.34 43.5,45.34 U$4.13 43.82,45.34 45.4,45.34 v47.62,43.12 | C9.1 58.42,29.15 58.1,29.46 53.98,29.46 RESET1.2 53.98,29.78 53.98,32.32 R15.1 53.98,32.64 v52.71,33.91 | v47.62,40.58 48.26,39.94 v50.8,39.94
  Bottom 0.305: v47.62,40.58 v47.62,43.12 | v50.8,39.94 52.71,38.04 v52.71,33.91
RX  (via drill 0.5)
  Top 0.305: v39.05,38.04 40.64,39.62 43.5,39.62 U$4.20 | v43.5,24.07 v38.74,28.83 | v44.77,22.16 62.55,22.16 65.72,25.34 65.72,27.56 v66.67,27.56
  Bottom 0.305: v39.05,38.04 38.74,37.72 v38.74,28.83 | v43.5,24.07 44.77,22.8 v44.77,22.16
  Bottom 0.406: v66.67,27.56 66.67,28.69 R8.1
SCK  (via drill 0.5)
  Top 0.305: v37.78,46.29 37.47,46.61 35.24,46.61 35.24,48.83 CON1.SCK | v40.01,48.83 40.32,49.15 46.67,49.15 46.99,48.83 46.99,48.2 U$4.9 | 19.68,61.85 20,62.17 v23.81,62.17 | 19.68,61.85 v17.78,59.94 | 19.68,61.85 24.77,61.85 25.4,62.48 26.04,62.48 28.57,59.94 28.57,56.77 28.96,56.39 v34.29,56.39 | v35.56,54.23 36.2,53.59 v40.01,53.59
  Bottom 0.305: v37.78,46.29 40.01,48.51 v40.01,48.83 40.01,51.05 40.64,51.69 40.64,52.96 v40.01,53.59 | U$14.SCLK 17.78,59.63 v17.78,59.94 | 24.13,61.85 v23.81,62.17 | v34.29,56.39 35.56,55.5 v35.56,54.23
SCL  (via drill 0.5)
  Top 0.305: v42.23,67.88 33.02,67.88 29.84,64.71 v28.89,64.71 | v41.28,41.21 43.5,41.21 U$4.18 | 44.13,53.59 44.13,53.91 v58.42,53.91 | 44.13,53.59 v44.13,50.74 | v58.42,55.82 58.42,58.67 U$1.6 | v41.59,54.55 42.55,53.59 44.13,53.59
  Bottom 0.305: v28.89,64.71 28.89,65.02 27.94,65.98 U$15.SCL | I2C.SCL 44.13,77.41 44.13,68.52 43.82,68.2 R28.2 43.82,68.52 42.86,68.52 v42.23,67.88 41.59,67.88 v41.59,54.55 | v41.28,41.21 44.13,44.07 v44.13,50.74 | v58.42,55.82 v58.42,53.91
SDA  (via drill 0.5)
  Top 0.305: 49.85,60.9 52.07,60.9 52.39,61.21 54.61,61.21 55.56,60.26 57.47,60.26 58.42,61.21 60.43,61.21 U$1.5 61.6,59.94 61.28,60.26 | 49.85,60.9 v45.09,60.9 42.86,63.12 30.48,63.12 29.53,62.17 v29.21,62.17 | v46.36,41.85 45.09,40.58 43.82,40.58 U$4.19 | 49.85,60.9 v49.85,61.53 | v45.09,72.33 I2C.SDA
  Bottom 0.305: v29.21,62.17 25.4,65.98 U$15.SDA | v46.36,41.85 45.09,43.12 v45.09,60.9 | v49.85,61.53 49.85,68.2 47.94,68.2 R29.2 47.62,68.52 47.62,69.79 v45.09,72.33
TX  (via drill 0.5)
  Top 0.305: v41.28,38.35 41.91,38.99 43.5,38.99 U$4.21 | v42.23,24.07 43.18,23.11 v58.1,23.11 | v60.01,25.02 60.01,28.19 v62.23,28.19
  Bottom 0.305: v41.28,38.35 42.23,37.4 v42.23,24.07 | v60.01,25.02 v58.1,23.11
  Bottom 0.406: v62.23,28.19 61.53,28.89 R11.1
USB_N  (via drill 0.5)
  Top 0.305: v52.07,52.96 52.07,48.51 U$4.3 | v51.44,55.5 50.8,56.13 v48.26,56.13 | v46.36,58.04 42.55,62.48 31.11,62.48 29.84,61.21 28.57,61.21 v27.3,62.48 | v25.4,52.96 24.77,52.32 R31.1
  Bottom 0.305: v51.44,55.5 51.44,54.23 52.07,53.59 v52.07,52.96 | v46.36,58.04 v48.26,56.13 | v27.3,62.48 24.77,62.48 24.77,60.58 25.4,59.94 v25.4,52.96
USB_P  (via drill 0.5)
  Top 0.305: v46.04,55.5 33.34,55.5 32.07,54.23 28.57,54.23 v28.26,54.55 | R24.1 v26.67,49.15 | U$4.4 51.12,48.2 51.12,49.78 51.44,50.1 51.44,51.69 50.17,52.96 v48.58,52.96
  Bottom 0.305: v46.04,55.5 v48.58,52.96 | v28.26,54.55 26.67,52.96 v26.67,49.15
USBC_N
  Top 0.305: R31.2 19.68,52.32 19.37,52.01 9.53,52.01 X4.2
USBC_P
  Top 0.305: X4.3 17.46,51.37 19.68,49.15 R24.2
VUSB  (via drill 0.5)
  Top 0.305: v18.73,47.56 18.73,44.7 20.95,42.48 21.91,42.48 23.18,41.21 D4.A | v18.1,54.55 26.99,54.55 28.57,52.96 37.47,52.96 40.64,49.78 48.58,49.78 48.58,48.2 U$4.7 | v13.02,52.96 9.53,52.96 X4.1
  Bottom 0.305: v18.73,47.56 16.83,49.47 16.83,50.74 | 16.83,50.74 15.88,51.69 14.92,51.69 14.92,52.01 C7.2 14.61,52.32 13.65,52.32 v13.02,52.96 | v18.1,54.55 16.83,53.28 16.83,50.74
XTAL1
  Top 0.305: U$4.16 43.5,42.8 40.01,42.8 39.37,43.43 R13.1 39.05,43.75 38.1,44.7 35.56,44.7 X3.P$1 35.24,44.7 32.38,44.7 31.75,44.07 C2.2

## Text on the board
tNames: D9:12Vpump | PID | 1 | D5:12V Fan | D6:IR-18W | D7:Pelt50W | D10:Pelt75W | T_source
203bmp: C:/Users/G/Pictures/logo_epfl.bmp